# Altium PCB MainBoard.PcbDoc (part 3 of 5)
Units mm, origin at the board's own origin, x right, y up, seen from the top; angles counter-clockwise.
Board outline 82.5 x 82.5 mm, 2 copper layers (Top Layer, Bottom Layer); 145 components, 141 nets, 702 pads, 289 vias.
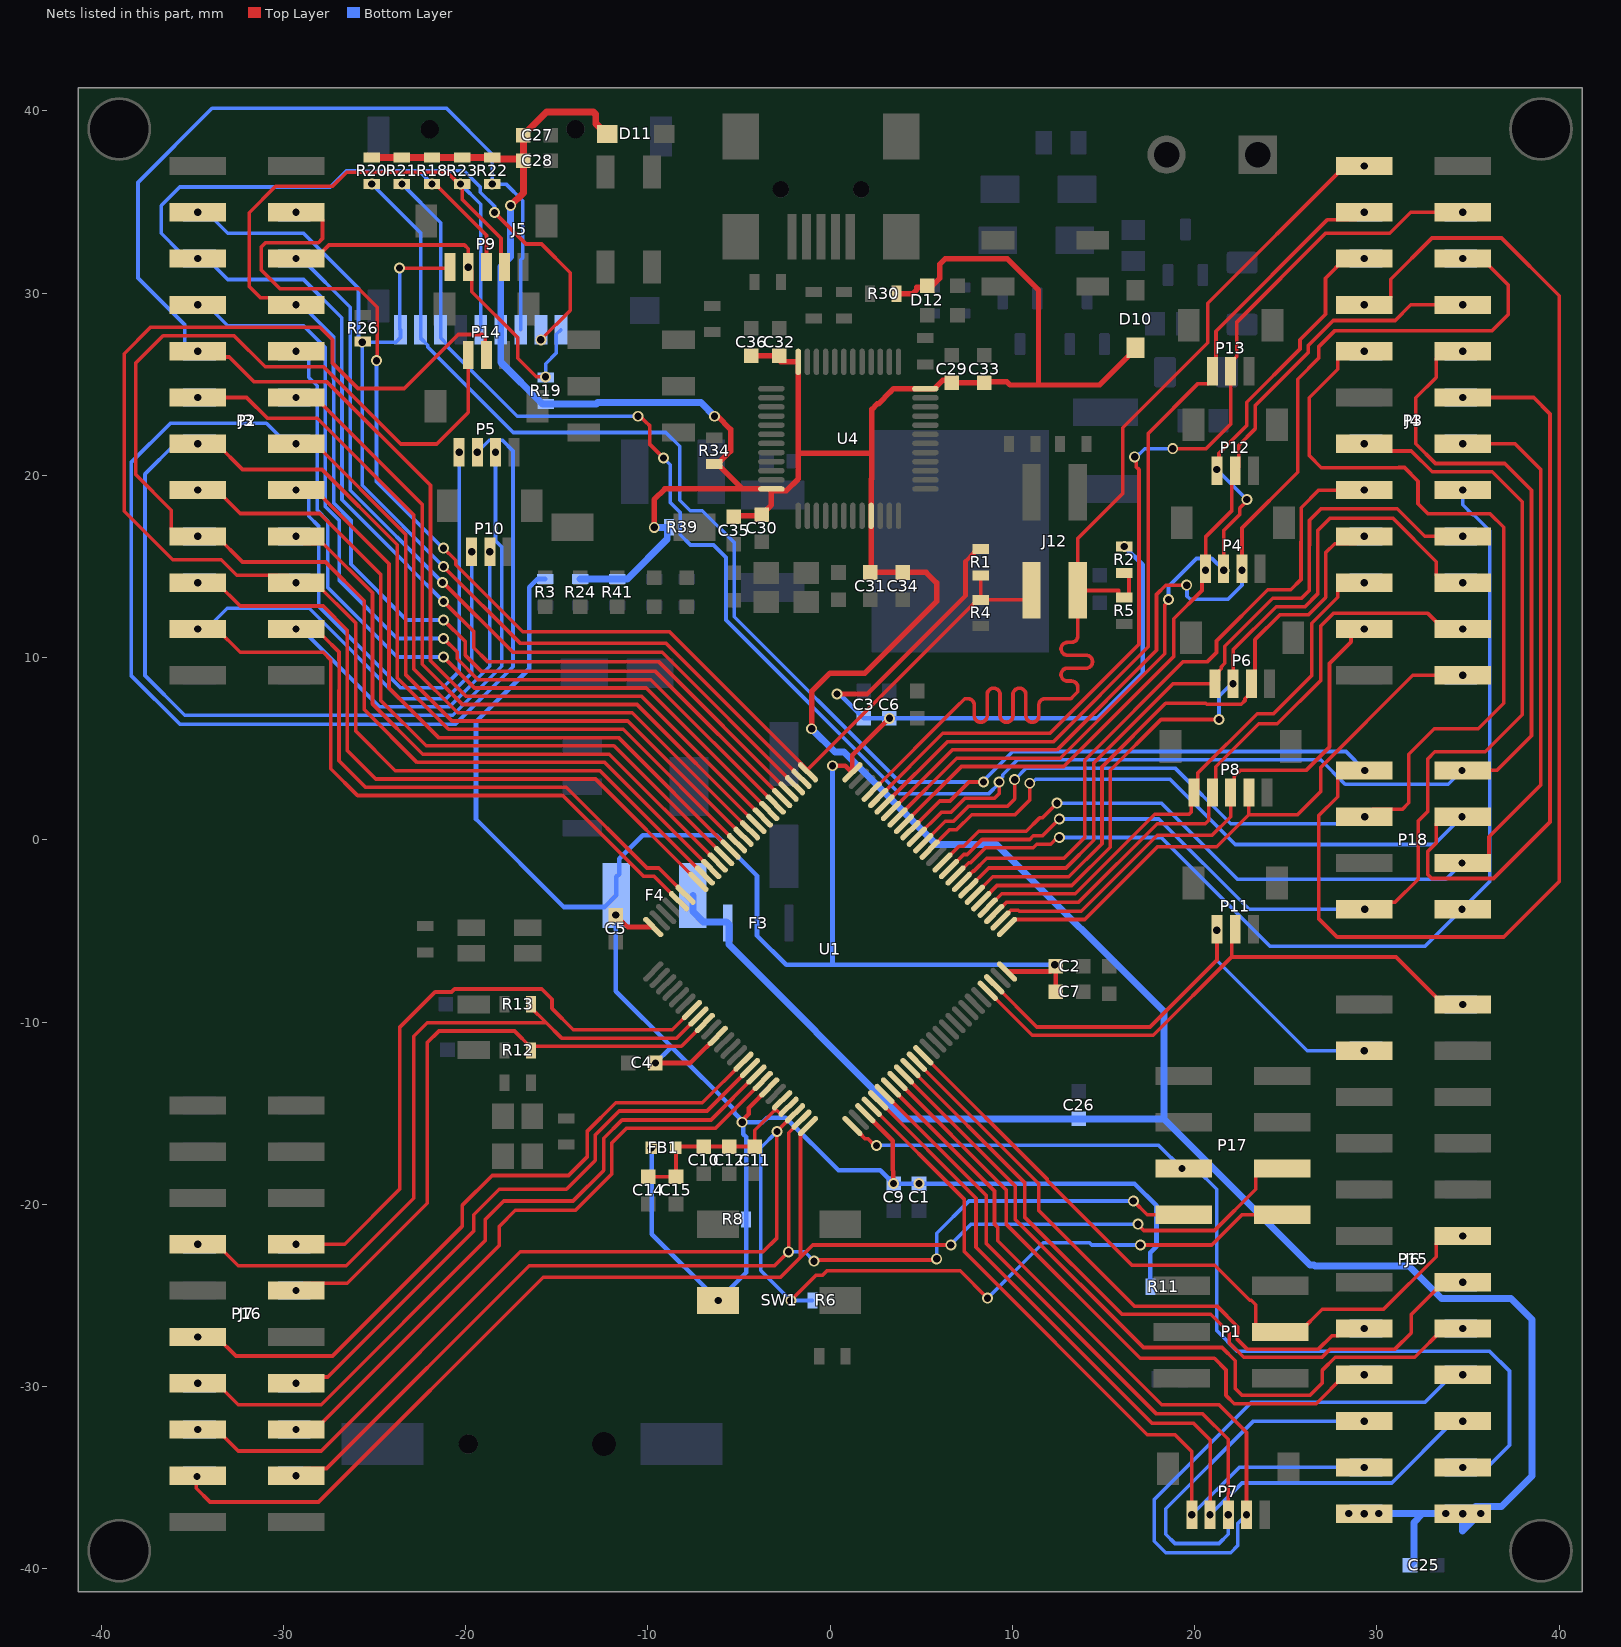
[diagram p2: the nets of this part, all layers, seen from the top]

## Part data (continued)
J8: library part CMP-111-000033-1, "Mini USB 2.0 Type B Receptacle WR-COM, Horizontal, SMT, with Pads and Pegs", Contact Resistance="20 mOhm", Operating Temperature="-40 to 105 degC", Rated Current="1 A", Working Voltage="30 VAC", Component Type=Standard, ComponentLink1Description=Datasheet, ComponentLink1URL=https://katalog.we-online.de/em/datasheet/65100516121.pdf, ComponentLink2Description="Supplier 1 URL", ComponentLink2URL=N/A, ComponentLink3Description="Supplier 2 URL", ComponentLink3URL=N/A, ComponentLink4Description="Supplier 3 URL", ComponentLink4URL=N/A, Connector Type="Mini USB 2.0 Type B", Design Item ID=65100516121, Gender=Receptacle, Mounting Technology=SMT, Orientation=Horizontal, Packaging="Tape and Reel", Part Number=65100516121, Pin Count=6, Published Date="September 2018", Publisher="Wurth Elektronik", Source="USB Connectors WR-COM.SchLib", Supplier 1 Name=Mouser, Supplier 1 SN=710-65100516121, Supplier 1 URL=https://www.mouser.vn/ProductDetail/Wurth-Elektronik/65100516121?qs=rS3zZhy2AQPLyCguT204Og%3D%3D, Supplier 2 Name=Digi-Key, Supplier 2 SN=N/A, Supplier 2 URL=N/A, Supplier 3 Name=thegioiic, Supplier 3 SN=N/A, Supplier 3 URL=N/A
J9 J10: library part CMP-002-00342-1, "WR-PHD Socket Header, SMT, pitch 2.54mm, Dual Row, Vertical, 4p", Contact Resistance=20mOhm, Manufacturer="Wurth Elektronik", Manufacturer Part Number=61000421821, Operating Temperature="-40 to +105degC", Rated Current=3A, Withstanding Voltage=600VAC, Working Voltage=250VAC, Component Type=Standard, ComponentLink1Description=Manufacturer, ComponentLink1URL=http://www.we-online.de, ComponentLink2Description=Datasheet, ComponentLink2URL=https://www.we-online.com/catalog/datasheet/61000421821.pdf, ComponentLink3Description="Global Supply", ComponentLink3URL=https://www.we-online.com/en/components/products/PHD_2_54_SMT_DUAL_SOCKET_HEADER_6100XX21821?sq=61000421821#61000421821, ComponentLink4Description="Global Supply", ComponentLink4URL=https://www.mouser.vn/ProductDetail/Wurth-Elektronik/61000421821?qs=ulEaXIWI0c%2F%252BuIEt%2FF6jcQ%3D%3D, ComponentLink5Description="Local Supply", ComponentLink5URL=https://www.thegioiic.com/hang-rao-cai-doi-2-54mm-4-chan-2-hang-smd, Design Item ID=61000421821, Gender="Socket Header", Mounting Technology=SMT, Orientation=Vertical, Packaging=Tube, Pin Number=4, Pins=4, Pitch=2.54mm, Published Date="May 2020", Row Number=Dual, Source="WR-PHD_Socket Header_2.54mm.SchLib", Supplier 1 Name=Mouser, Supplier 1 SN=710-61000421821, Supplier 1 URL=https://www.mouser.vn/ProductDetail/Wurth-Elektronik/61000421821?qs=ulEaXIWI0c%2F%252BuIEt%2FF6jcQ%3D%3D, Supplier 2 Name=Digi-Key, Supplier 2 SN=N/A, Supplier 2 URL=N/A, Supplier 3 Name=thegioiic, Supplier 3 SN=N/A, Supplier 3 URL=https://www.thegioiic.com/hang-rao-cai-doi-2-54mm-4-chan-2-hang-smd
J11: library part CMP-002-00440-1, "WR-PHD Socket Header, SMT, pitch 2.54mm, Dual Row, Vertical, 6p", Contact Resistance=20mOhm, Manufacturer="Wurth Elektronik", Manufacturer Part Number=61030621821, Operating Temperature="-40 to +105degC", Rated Current=3A, Withstanding Voltage=600VAC, Working Voltage=250VAC, Component Type=Standard, ComponentLink1Description=Manufacturer, ComponentLink1URL=http://www.we-online.de, ComponentLink2Description=Datasheet, ComponentLink2URL=https://www.we-online.com/catalog/datasheet/61030621821.pdf, ComponentLink3Description="Global Supply", ComponentLink3URL=https://www.we-online.com/en/components/products/PHD_2_54_SMT_DUAL_SOCKET_HEADER_6100XX21821?sq=61030621821#61030621821, ComponentLink4Description="Global Supply", ComponentLink4URL=https://www.mouser.vn/ProductDetail/Wurth-Elektronik/61030621821?qs=Cb2nCFKsA8prWiqa1E1TsA%3D%3D, Design Item ID=61030621821, Gender="Socket Header", Mounting Technology=SMT, Orientation=Vertical, Packaging="Tape and Reel", Pin Number=6, Pins=6, Pitch=2.54mm, Published Date="May 2020", Row Number=Dual, Source="WR-PHD_Socket Header_2.54mm.SchLib", Supplier 1 Name=Mouser, Supplier 1 SN=710-61030621821, Supplier 1 URL=https://www.mouser.vn/ProductDetail/Wurth-Elektronik/61030621821?qs=Cb2nCFKsA8prWiqa1E1TsA%3D%3D, Supplier 2 Name=Digi-Key, Supplier 2 SN=N/A, Supplier 2 URL=N/A, Supplier 3 Name=thegioiic, Supplier 3 SN=N/A, Supplier 3 URL=N/A
J12: library part CMP-002-00436-1, "WR-PHD Pin Header, SMT, pitch 2.54mm, Dual Row, Vertical, 4p", Contact Resistance=20mOhm, Manufacturer="Wurth Elektronik", Operating Temperature="-40 to +125degC", Rated Current=3A, Withstanding Voltage=500VAC, Working Voltage=250VAC, Component Type=Standard, ComponentLink1Description=Manufacturer, ComponentLink1URL=http://www.we-online.de, ComponentLink2Description=Datasheet, ComponentLink2URL=https://www.we-online.com/catalog/datasheet/61030421121.pdf, ComponentLink3Description="Global Supply", ComponentLink3URL=https://www.we-online.com/en/components/products/PHD_2_54_SMT_DUAL_PIN_HEADER_6100XX21121?sq=61030421121#61030421121, ComponentLink4Description="Global Supply", ComponentLink4URL=https://www.mouser.vn/ProductDetail/Wurth-Elektronik/61030421121?qs=PhR8RmCirEbubONBDfvqcw%3D%3D, Design Item ID=61030421121, Gender="Pin Header", Manufacturer Part Number=61030421121, Mounting Technology=SMT, Orientation=Vertical, Packaging="Tape and Reel", Pin Number=4, Pins=4, Pitch=2.54mm, Published Date="May 2020", Row Number=Dual, Source="WR-PHD_Pin Header_2.54mm.SchLib", Supplier 1 Name=Mouser, Supplier 1 SN=710-61030421121, Supplier 1 URL=https://www.mouser.vn/ProductDetail/Wurth-Elektronik/61030421121?qs=PhR8RmCirEbubONBDfvqcw%3D%3D, Supplier 2 Name=Digi-Key, Supplier 2 SN=N/A, Supplier 2 URL=N/A, Supplier 3 Name=thegioiic, Supplier 3 SN=N/A, Supplier 3 URL=N/A, Supply name 1=Mouser
P1: library part CMP-002-00439-1, "WR-PHD Pin Header, SMT, pitch 2.54mm, Dual Row, Vertical, 6p", Contact Resistance=20mOhm, Manufacturer="Wurth Elektronik", Manufacturer Part Number=61030621121, Operating Temperature="-40 to +125degC", Rated Current=3A, Withstanding Voltage=500VAC, Working Voltage=250VAC, Component Type=Standard, ComponentLink1Description=Manufacturer, ComponentLink1URL=http://www.we-online.de, ComponentLink2Description=Datasheet, ComponentLink2URL=https://www.we-online.com/catalog/datasheet/61030621121.pdf, ComponentLink3Description="Global Supply", ComponentLink3URL=https://www.we-online.com/en/components/products/PHD_2_54_SMT_DUAL_PIN_HEADER_6100XX21121?sq=61030621121#61030621121, ComponentLink4Description="Global Supply", ComponentLink4URL=https://www.mouser.vn/ProductDetail/Wurth-Elektronik/61030621121?qs=PhR8RmCirEbl%2F20%2FFLRJRA%3D%3D, Design Item ID=61030621121, Gender="Pin Header", Mounting Technology=SMT, Orientation=Vertical, Packaging="Tape and Reel", Pin Number=6, Pins=6, Pitch=2.54mm, Published Date="May 2020", Row Number=Dual, Source="WR-PHD_Pin Header_2.54mm.SchLib", Supplier 1 Name=Mouser, Supplier 1 SN=710-61000621121, Supplier 1 URL=https://www.mouser.vn/ProductDetail/Wurth-Elektronik/61000621121?qs=PhR8RmCirEYoFU9UUO%252Bbug%3D%3D, Supplier 2 Name=Digi-Key, Supplier 2 SN=N/A, Supplier 2 URL=N/A, Supplier 3 Name=thegioiic, Supplier 3 SN=N/A, Supplier 3 URL=N/A, Supply name 1=Mouser
P2 P3 P15: library part CMP-002-00395-1, "WR-PHD Pin Header, SMT, pitch 2.54mm, Dual Row, Vertical, 24p", Contact Resistance=20mOhm, Manufacturer="Wurth Elektronik", Operating Temperature="-40 to +125degC", Rated Current=3A, Withstanding Voltage=500VAC, Working Voltage=250VAC, Component Type=Standard, ComponentLink1Description=Manufacturer, ComponentLink1URL=http://www.we-online.de, ComponentLink2Description=Datasheet, ComponentLink2URL=https://www.we-online.com/catalog/datasheet/61002421121.pdf, ComponentLink3Description="Global Supply", ComponentLink3URL=https://www.we-online.com/en/components/products/PHD_2_54_SMT_DUAL_PIN_HEADER_6100XX21121?sq=61002421121#61002421121, ComponentLink4Description="Global Supply", ComponentLink4URL=https://www.mouser.vn/ProductDetail/Wurth-Elektronik/61002421121?qs=PhR8RmCirEaUrVIpVd3oMg%3D%3D, Design Item ID=61002421121, Gender="Pin Header", Manufacturer Part Number=61002421121, Mounting Technology=SMT, Orientation=Vertical, Packaging=Tube, Pin Number=24, Pins=24, Pitch=2.54mm, Published Date="May 2020", Row Number=Dual, Source="WR-PHD_Pin Header_2.54mm.SchLib", Supplier 1 Name=Mouser, Supplier 1 SN=710-61002421121, Supplier 1 URL=https://www.mouser.vn/ProductDetail/Wurth-Elektronik/61002421121?qs=PhR8RmCirEaUrVIpVd3oMg%3D%3D, Supplier 2 Name=Digi-Key, Supplier 2 SN=N/A, Supplier 2 URL=N/A, Supplier 3 Name=thegioiic, Supplier 3 SN=N/A, Supplier 3 URL=N/A, Supply name 1=Mouser
P4 P5 P6: library part CMP-002-01224-1, "WR-WTB SMT Male Vertical Shrouded Header, pitch 1mm, 4p", Contact Resistance=20mOhm, Operating Temperature="-25 to +85degC", Rated Current=1A, Withstanding Voltage=500VAC, Working Voltage=50VAC, Component Type=Standard, ComponentLink1Description=Manufacturer, ComponentLink1URL=http://www.we-online.de, ComponentLink2Description=Datasheet, ComponentLink2URL=https://www.we-online.com/catalog/datasheet/665304124022.pdf, ComponentLink3Description="Global Supply", ComponentLink3URL=https://www.we-online.com/en/components/products/WTB_1_00_SMT_MALE_VERTICAL_SHROUDED_HEADER_6653XX124022?sq=665304124022#665304124022, ComponentLink4Description="Global Supply", ComponentLink4URL=https://www.mouser.vn/ProductDetail/Wurth-Elektronik/665304124022?qs=a9WhcLg8qCx8aEna1KcTfg%3D%3D, Design Item ID=665304124022, Gender=Male, Mounting Technology=SMT, Packaging="Tape and Reel", Part Number=665304124022, Pin Number=4, Pins=4, Pitch=1mm, Published Date="January 2020", Publisher="Wurth Elektronik", Source=WR-WTB_1.00mm.SchLib, Supplier 1 Name=Mouser, Supplier 1 SN=710-665304124022, Supplier 1 URL=https://www.mouser.vn/ProductDetail/Wurth-Elektronik/665304124022?qs=a9WhcLg8qCx8aEna1KcTfg%3D%3D, Supplier 2 Name=Digi-Key, Supplier 2 SN=N/A, Supplier 2 URL=N/A, Supplier 3 Name=thegioiic, Supplier 3 SN=N/A, Supplier 3 URL=N/A, Type=Vertical
P7 P8 P9: library part CMP-002-01225-1, "WR-WTB SMT Male Vertical Shrouded Header, pitch 1mm, 5p", Contact Resistance=20mOhm, Operating Temperature="-25 to +85degC", Rated Current=1A, Withstanding Voltage=500VAC, Working Voltage=50VAC, Component Type=Standard, ComponentLink1Description=Manufacturer, ComponentLink1URL=http://www.we-online.de, ComponentLink2Description=Datasheet, ComponentLink2URL=https://www.we-online.com/catalog/datasheet/665305124022.pdf, ComponentLink3Description="Global Supply", ComponentLink3URL=https://www.we-online.com/en/components/products/WTB_1_00_SMT_MALE_VERTICAL_SHROUDED_HEADER_6653XX124022?sq=665305124022#665305124022, ComponentLink4Description="Global Supply", ComponentLink4URL=https://www.mouser.vn/ProductDetail/Wurth-Elektronik/665305124022?qs=a9WhcLg8qCwo9s3v61a5IA%3D%3D, Design Item ID=665305124022, Gender=Male, Mounting Technology=SMT, Packaging="Tape and Reel", Part Number=665305124022, Pin Number=5, Pins=5, Pitch=1mm, Published Date="January 2020", Publisher="Wurth Elektronik", Source=WR-WTB_1.00mm.SchLib, Supplier 1 Name=Mouser, Supplier 1 SN=710-665305124022, Supplier 1 URL=https://www.mouser.vn/ProductDetail/Wurth-Elektronik/665305124022?qs=a9WhcLg8qCwo9s3v61a5IA%3D%3D, Supplier 2 Name=Digi-Key, Supplier 2 SN=N/A, Supplier 2 URL=N/A, Supplier 3 Name=thegioiic, Supplier 3 SN=N/A, Supplier 3 URL=N/A, Type=Vertical
P10 P11 P12 P13 P14: library part CMP-002-01223-1, "WR-WTB SMT Male Vertical Shrouded Header, pitch 1mm, 3p", Contact Resistance=20mOhm, Operating Temperature="-25 to +85degC", Rated Current=1A, Withstanding Voltage=500VAC, Working Voltage=50VAC, Component Type=Standard, ComponentLink1Description=Manufacturer, ComponentLink1URL=http://www.we-online.de, ComponentLink2Description=Datasheet, ComponentLink2URL=https://www.we-online.com/catalog/datasheet/665303124022.pdf, ComponentLink3Description="Global Supply", ComponentLink3URL=https://www.we-online.com/en/components/products/WTB_1_00_SMT_MALE_VERTICAL_SHROUDED_HEADER_6653XX124022?sq=665303124022#665303124022, ComponentLink4Description="Global Supply", ComponentLink4URL=https://www.mouser.vn/ProductDetail/Wurth-Elektronik/665303124022?qs=a9WhcLg8qCyV5ri9HU4hCQ%3D%3D, Design Item ID=665303124022, Gender=Male, Mounting Technology=SMT, Packaging="Tape and Reel", Part Number=665303124022, Pin Number=3, Pins=3, Pitch=1mm, Published Date="January 2020", Publisher="Wurth Elektronik", Source=WR-WTB_1.00mm.SchLib, Supplier 1 Name=Mouser, Supplier 1 SN=710-665303124022, Supplier 1 URL=https://www.mouser.vn/ProductDetail/Wurth-Elektronik/665303124022?qs=a9WhcLg8qCyV5ri9HU4hCQ%3D%3D, Supplier 2 Name=Digi-Key, Supplier 2 SN=N/A, Supplier 2 URL=N/A, Supplier 3 Name=thegioiic, Supplier 3 SN=N/A, Supplier 3 URL=N/A, Type=Vertical
P16: library part CMP-002-00458-1, "WR-PHD Pin Header, SMT, pitch 2.54mm, Dual Row, Vertical, 20p", Contact Resistance=20mOhm, Manufacturer="Wurth Elektronik", Operating Temperature="-40 to +125degC", Rated Current=3A, Withstanding Voltage=500VAC, Working Voltage=250VAC, Component Type=Standard, ComponentLink1Description=Manufacturer, ComponentLink1URL=http://www.we-online.de, ComponentLink2Description=Datasheet, ComponentLink2URL=https://www.we-online.com/catalog/datasheet/61032021121.pdf, ComponentLink3Description="Global Supply", ComponentLink3URL=https://www.we-online.com/en/components/products/PHD_2_54_SMT_DUAL_PIN_HEADER_6100XX21121?sq=61032021121#61032021121, ComponentLink4Description="Global Supply", ComponentLink4URL=https://www.mouser.vn/ProductDetail/Wurth-Elektronik/61032021121?qs=PhR8RmCirEazLxlZVVgCjg%3D%3D, Design Item ID=61032021121, Gender="Pin Header", Manufacturer Part Number=61032021121, Mounting Technology=SMT, Orientation=Vertical, Packaging="Tape and Reel", Pin Number=20, Pins=20, Pitch=2.54mm, Published Date="May 2020", Row Number=Dual, Source="WR-PHD_Pin Header_2.54mm.SchLib", Supplier 1 Name=Mouser, Supplier 1 SN=710-61032021121, Supplier 1 URL=https://www.mouser.vn/ProductDetail/Wurth-Elektronik/61032021121?qs=PhR8RmCirEazLxlZVVgCjg%3D%3D, Supplier 2 Name=Digi-Key, Supplier 2 SN=N/A, Supplier 2 URL=N/A, Supplier 3 Name=thegioiic, Supplier 3 SN=N/A, Supplier 3 URL=N/A, Supply name 1=Mouser
P17 P18: library part CMP-002-00442-1, "WR-PHD Pin Header, SMT, pitch 2.54mm, Dual Row, Vertical, 8p", Contact Resistance=20mOhm, Manufacturer="Wurth Elektronik", Operating Temperature="-40 to +125degC", Rated Current=3A, Withstanding Voltage=500VAC, Working Voltage=250VAC, Component Type=Standard, ComponentLink1Description=Manufacturer, ComponentLink1URL=http://www.we-online.de, ComponentLink2Description=Datasheet, ComponentLink2URL=https://www.we-online.com/catalog/datasheet/61030821121.pdf, ComponentLink3Description="Global Supply", ComponentLink3URL=https://www.we-online.com/en/components/products/PHD_2_54_SMT_DUAL_PIN_HEADER_6100XX21121?sq=61030821121#61030821121, ComponentLink4Description="Global Supply", ComponentLink4URL=https://www.mouser.vn/ProductDetail/Wurth-Elektronik/61030821121?qs=PhR8RmCirEbjbnJ8oQ44mA%3D%3D, Design Item ID=61030821121, Gender="Pin Header", Manufacturer Part Number=61030821121, Mounting Technology=SMT, Orientation=Vertical, Packaging="Tape and Reel", Pin Number=8, Pins=8, Pitch=2.54mm, Published Date="May 2020", Row Number=Dual, Source="WR-PHD_Pin Header_2.54mm.SchLib", Supplier 1 Name=Mouser, Supplier 1 SN=710-61030821121, Supplier 1 URL=https://www.mouser.vn/ProductDetail/Wurth-Elektronik/61030821121?qs=PhR8RmCirEbjbnJ8oQ44mA%3D%3D, Supplier 2 Name=Digi-Key, Supplier 2 SN=N/A, Supplier 2 URL=N/A, Supplier 3 Name=thegioiic, Supplier 3 SN=N/A, Supplier 3 URL=N/A, Supply name 1=Mouser
Q1 Q2 Q3: library part CMP-123-000000-1, "P-Channel 30 V 4.3A (Ta) 1.4W (Ta) Surface Mount SOT-23-3", Package="SOT-23 Alpha &amp; Omega Semiconductor", Check_prices=https://www.snapeda.com/parts/AO3407A/Alpha/view-part/?ref=eda, Component Type=Standard, Design Item ID=AO3407A, MF="Alpha &", MP=AO3407A, Pin Count=3, SnapEDA_Link=https://www.snapeda.com/parts/AO3407A/Alpha/view-part/?ref=snap, Source=AO3407A.SchLib
R1 R2 R4 R5 R7 R8 R11 R14 R18 R19 R20 R21 R22 R23 R26 R34 R35 R39: library part CMP-009-00188-1, "RES, size 0603, 10 KOhm, 1/4 W", Manufacture  Name=OEM, Rated Power="1/4 W", Resistance Tolerance=+/-1%, Component Type=Standard, ComponentLink1Description="Datasheet link", ComponentLink1URL=https://fscdn.rohm.com/en/products/databook/datasheet/passive/resistor/chip_resistor/esr-e.pdf, ComponentLink2Description="Supplier 1 URL", ComponentLink2URL=N/A, ComponentLink3Description="Supplier 2 URL", ComponentLink3URL=https://www.digikey.com/en/products/detail/rohm-semiconductor/ESR03EZPF1002/1983429, ComponentLink4Description="Supplier 3 URL", ComponentLink4URL=N/A, Design Item ID=0006031031, Manufacture  SN=OEM, Mounting Technology=SMT, Pins=2, Size=0603, Source=Resistor_0603.SchLib, Supplier 1 Name=Mouser, Supplier 1 SN=755-ESR03EZPF1002, Supplier 1 URL=https://www.mouser.vn/ProductDetail/ROHM-Semiconductor/ESR03EZPF1002?qs=sGAEpiMZZMvdGkrng054t67Efho1F8r6CDeAsqwFse8%3D, Supplier 2 Name=Digi-Key, Supplier 2 SN="RHM10KADTR-ND RHM10KADCT-ND RHM10KADDKR-ND", Supplier 2 URL=https://www.digikey.com/en/products/detail/rohm-semiconductor/ESR03EZPF1002/1983429, Supplier 3 Name=thegioiic, Supplier 3 SN=N/A, Supplier 3 URL=N/A
R3 R24 R25 R27 R28: library part CMP-009-00209-1, "RES, size 0603, 1.2 KOhm, 1/4 W", Manufacture  Name=OEM, Rated Power="1/4 W", Resistance Tolerance=+/-1%, Component Type=Standard, ComponentLink1Description="Datasheet link", ComponentLink1URL=https://api.pim.na.industrial.panasonic.com/file_stream/main/fileversion/4484, ComponentLink2Description="Supplier 1 URL", ComponentLink2URL=N/A, ComponentLink3Description="Supplier 2 URL", ComponentLink3URL=N/A, ComponentLink4Description="Supplier 3 URL", ComponentLink4URL=N/A, Design Item ID=0006031221, Manufacture  SN=OEM, Mounting Technology=SMT, Pins=2, Size=0603, Source=Resistor_0603.SchLib, Supplier 1 Name=Mouser, Supplier 1 SN=667-ERJ-UP3F1201V, Supplier 1 URL=https://www.mouser.vn/ProductDetail/Panasonic/ERJ-UP3F1201V?qs=sGAEpiMZZMvdGkrng054twq3eZrCFN895BO3G72d%2F02jECAea43bgQ%3D%3D, Supplier 2 Name=Digi-Key, Supplier 2 SN="10-ERJ-UP3F1201VTR-ND 10-ERJ-UP3F1201VCT-ND 10-ERJ-UP3F1201VDKR-ND", Supplier 2 URL=N/A, Supplier 3 Name=thegioiic, Supplier 3 SN=N/A, Supplier 3 URL=N/A
R6 R9 R10 R12 R13 R31 R32: library part CMP-009-00180-1, "RES, size 0603, 0 Ohm, 1/4 W", Manufacture  Name=YAGEO, Manufacture  SN=AC0603FR-070RL, Rated Power="1/4 W", Resistance Tolerance=+/-1%, Component Type=Standard, ComponentLink1Description="Datasheet link", ComponentLink1URL=https://www.mouser.com/datasheet/2/447/Yageo_06282023_ACseries-3224032.pdf, ComponentLink2Description="Supplier 1 URL", ComponentLink2URL=N/A, ComponentLink3Description="Supplier 2 URL", ComponentLink3URL=https://www.digikey.com/en/products/detail/yageo/ac0603fr-070rl/2827812, ComponentLink4Description="Supplier 3 URL", ComponentLink4URL=N/A, Design Item ID=0006030001, Mounting Technology=SMT, Pins=2, Size=0603, Source=Resistor_0603.SchLib, Supplier 1 Name=Mouser, Supplier 1 SN=603-AC0603FR-070RL, Supplier 1 URL=https://www.mouser.com/ProductDetail/YAGEO/AC0603FR-070RL?qs=sGAEpiMZZMtlubZbdhIBIOG3KwTtqrl%2FD2D%252BGuMCfoY%3D, Supplier 2 Name=Digi-Key, Supplier 2 SN=311-0.0LDTR-ND, Supplier 2 URL=https://www.digikey.com/en/products/detail/yageo/ac0603fr-070rl/2827812, Supplier 3 Name=thegioiic, Supplier 3 SN=N/A, Supplier 3 URL=https://www.thegioiic.com/dien-tro-0-ohm-0603-1-
R15 R16 R17: library part CMP-009-00482-1, "RES, size 0805, 10 KOhm, 1/8 W", Manufacture  Name="Vishay Dale", Manufacture  SN=CRCW080515K0FKEAC, Rated Power="1/8 W", Resistance Tolerance=+/-1%, Component Type=Standard, ComponentLink1Description="Datasheet link", ComponentLink1URL=https://www.vishay.com/docs/28773/crcwce3.pdf, ComponentLink2Description="Supplier 1 URL", ComponentLink2URL=https://www.mouser.vn/ProductDetail/Vishay-Dale/CRCW080515K0FKEA?qs=bMjB6bAaLEM4rXT2DoR3BA%3D%3D, ComponentLink3Description="Supplier 2 URL", ComponentLink3URL=https://www.digikey.com/en/products/detail/vishay-dale/CRCW080515K0FKEAC/7928558, ComponentLink4Description="Supplier 3 URL", ComponentLink4URL=N/A, Design Item ID=0008051531, Mounting Technology=SMT, Pins=2, Size=0805, Source=Resistor_0805.SchLib, Supplier 1 Name=Mouser, Supplier 1 SN=71-CRCW0805-15K-E3, Supplier 1 URL=https://www.mouser.vn/ProductDetail/Vishay-Dale/CRCW080515K0FKEA?qs=bMjB6bAaLEM4rXT2DoR3BA%3D%3D, Supplier 2 Name=Digi-Key, Supplier 2 SN=541-4136-2-ND, Supplier 2 URL=https://www.digikey.com/en/products/detail/vishay-dale/CRCW080515K0FKEAC/7928558, Supplier 3 Name=Thegioiic, Supplier 3 SN=N/A, Supplier 3 URL=N/A
R29: library part CMP-009-00189-1, "RES, size 0603, 100 KOhm, 1/4 W", Manufacture  Name=OEM, Rated Power="1/4 W", Resistance Tolerance=+/-1%, Component Type=Standard, ComponentLink1Description="Datasheet link", ComponentLink1URL=https://www.yageo.com/upload/media/product/productsearch/datasheet/rchip/PYu-SR_20105_RoHS_L_10.pdf, ComponentLink2Description="Supplier 1 URL", ComponentLink2URL=N/A, ComponentLink3Description="Supplier 2 URL", ComponentLink3URL=https://www.digikey.com/en/products/detail/yageo/SR0603FR-7T100KL/9373095, ComponentLink4Description="Supplier 3 URL", ComponentLink4URL=N/A, Design Item ID=0006031041, Manufacture  SN=OEM, Mounting Technology=SMT, Pins=2, Size=0603, Source=Resistor_0603.SchLib, Supplier 1 Name=Mouser, Supplier 1 SN=603-SR0603FR-7T100KL, Supplier 1 URL=https://www.mouser.vn/ProductDetail/YAGEO/SR0603FR-7T100KL?qs=sGAEpiMZZMvdGkrng054tz1y1XEHv7sNa%252BA%2F4WiDMf7aGw4zRBb%2FFQ%3D%3D, Supplier 2 Name=Digi-Key, Supplier 2 SN="YAG5821TR-ND YAG5821CT-ND YAG5821DKR-ND", Supplier 2 URL=https://www.digikey.com/en/products/detail/yageo/SR0603FR-7T100KL/9373095, Supplier 3 Name=thegioiic, Supplier 3 SN=N/A, Supplier 3 URL=N/A
R30: library part CMP-009-00235-1, "RES, size 0603, 1.5  KOhm, 1/4 W", Manufacture  Name=OEM, Rated Power="1/4 W", Resistance Tolerance=+/-1%, Component Type=Standard, ComponentLink1Description="Datasheet link", ComponentLink1URL=N/A, ComponentLink2Description="Supplier 1 URL", ComponentLink2URL=N/A, ComponentLink3Description="Supplier 2 URL", ComponentLink3URL=https://www.digikey.com/en/products/detail/yageo/RC0603FR-071R5L/5918292, ComponentLink4Description="Supplier 3 URL", ComponentLink4URL=N/A, Design Item ID=0006031521, Manufacture  SN=OEM, Mounting Technology=SMT, Pins=2, Size=0603, Source=Resistor_0603.SchLib, Supplier 1 Name=Mouser, Supplier 1 SN=755-SFR03EZPF1501, Supplier 1 URL=https://www.mouser.vn/ProductDetail/ROHM-Semiconductor/SFR03EZPF1501?qs=byeeYqUIh0NryWvnzlukLQ%3D%3D, Supplier 2 Name=Digi-Key, Supplier 2 SN=13-RC0603FR-071R5LTR-ND, Supplier 2 URL=https://www.digikey.com/en/products/detail/yageo/RC0603FR-071R5L/5918292, Supplier 3 Name=thegioiic, Supplier 3 SN=N/A, Supplier 3 URL=N/A
R33: library part CMP-009-00184-1, "RES, size 0603, 100 Ohm, 1/4 W", Manufacture  Name=OEM, Rated Power="1/4 W", Resistance Tolerance=+/-1%, Component Type=Standard, ComponentLink1Description="Datasheet link", ComponentLink1URL=https://www.yageo.com/upload/media/product/productsearch/datasheet/rchip/PYu-SR_20105_RoHS_L_10.pdf, ComponentLink2Description="Supplier 1 URL", ComponentLink2URL=N/A, ComponentLink3Description="Supplier 2 URL", ComponentLink3URL=https://www.digikey.com/en/products/detail/yageo/SR0603FR-7T100RL/9373096https://www.digikey.com/en/products/detail/yageo/SR0603FR-7T100RL/9373096, ComponentLink4Description="Supplier 3 URL", ComponentLink4URL=N/A, Design Item ID=0006031011, Manufacture  SN=OEM, Mounting Technology=SMT, Pins=2, Size=0603, Source=Resistor_0603.SchLib, Supplier 1 Name=Mouser, Supplier 1 SN=603-SR0603FR-7T100RL, Supplier 1 URL=https://www.mouser.vn/ProductDetail/YAGEO/SR0603FR-7T100RL?qs=sGAEpiMZZMvdGkrng054tz1y1XEHv7sNOEBvi%2FAEoxbcgRjDGFawVw%3D%3D, Supplier 2 Name=Digi-Key, Supplier 2 SN="YAG5822TR-ND YAG5822CT-ND YAG5822DKR-ND", Supplier 2 URL=https://www.digikey.com/en/products/detail/yageo/SR0603FR-7T100RL/9373096https://www.digikey.com/en/products/detail/yageo/SR0603FR-7T100RL/9373096, Supplier 3 Name=thegioiic, Supplier 3 SN=N/A, Supplier 3 URL=N/A
R36 R37: library part CMP-009-00265-1, "RES, size 0603, 20 Ohm, 1/4 W", Manufacture  Name=OEM, Rated Power="1/4 W", Resistance Tolerance=+/-1%, Component Type=Standard, ComponentLink1Description="Datasheet link", ComponentLink1URL=N/A, ComponentLink2Description="Supplier 1 URL", ComponentLink2URL=N/A, ComponentLink3Description="Supplier 2 URL", ComponentLink3URL=https://www.digikey.com/en/products/detail/yageo/RC0603FR-1020RL/14008331, ComponentLink4Description="Supplier 3 URL", ComponentLink4URL=N/A, Design Item ID=0006032001, Manufacture  SN=OEM, Mounting Technology=SMT, Pins=2, Size=0603, Source=Resistor_0603.SchLib, Supplier 1 Name=Mouser, Supplier 1 SN=667-ERJ-H3EF20R0V, Supplier 1 URL=https://www.mouser.vn/ProductDetail/Panasonic/ERJ-H3EF20R0V?qs=eP2BKZSCXI5MeliV8G5lXA%3D%3D, Supplier 2 Name=Digi-Key, Supplier 2 SN=13-RC0603FR-1020RLTR-ND, Supplier 2 URL=https://www.digikey.com/en/products/detail/yageo/RC0603FR-1020RL/14008331, Supplier 3 Name=thegioiic, Supplier 3 SN=N/A, Supplier 3 URL=N/A
R38 R40 R41: library part CMP-009-00186-1, "RES, size 0603, 1 KOhm, 1/4 W", Manufacture  Name=OEM, Rated Power="1/4 W", Resistance Tolerance=+/-1%, Component Type=Standard, ComponentLink1Description="Datasheet link", ComponentLink1URL=https://www.yageo.com/upload/media/product/productsearch/datasheet/rchip/PYu-SR_20105_RoHS_L_10.pdf, ComponentLink2Description="Supplier 1 URL", ComponentLink2URL=N/A, ComponentLink3Description="Supplier 2 URL", ComponentLink3URL=https://www.digikey.com/en/products/detail/yageo/SR0603FR-7T1KL/9373103, ComponentLink4Description="Supplier 3 URL", ComponentLink4URL=N/A, Design Item ID=0006031021, Manufacture  SN=OEM, Mounting Technology=SMT, Pins=2, Size=0603, Source=Resistor_0603.SchLib, Supplier 1 Name=Mouser, Supplier 1 SN=71-RCS06031K00FKEA, Supplier 1 URL=https://www.mouser.vn/ProductDetail/Vishay-Dale/RCS06031K00FKEA?qs=sGAEpiMZZMvdGkrng054t9clqp6gtJJdzI9PGMrTQi4RTIuHToNahw%3D%3D, Supplier 2 Name=Digi-Key, Supplier 2 SN="YAG5829TR-ND YAG5829CT-ND YAG5829DKR-ND", Supplier 2 URL=https://www.digikey.com/en/products/detail/yageo/SR0603FR-7T1KL/9373103, Supplier 3 Name=thegioiic, Supplier 3 SN=N/A, Supplier 3 URL=N/A
Scr1 Scr2 Scr3 Scr4: library part CMP-143-000000-1, Component Type=Standard, Design Item ID=MP3.2, Pin Count=1, Source=MP_3P2.SchLib
SW1 SW2 SW3: library part CMP-011-00108-1, "WS-TASV SMT Tact Switch, L6 x W3.5 x H5mm, 260g, SPST-NO, 12V, 50mA", Manufacturer="Wurth Elektronik", Operating Temperature Max=85°C, Operating Temperature Min=-40°C, Rated Current=50mA, Rated Voltage=12VDC, Category="Tact Switches", Circuit=SPST-NO, Component Type=Standard, Contact Material="Stainless Steel", Design Item ID=434111050826, Height=5mm, Length=6mm, Manufacturer Part Number=434111050826, Match Code=WS-TASV, Mount="Surface Mount", Operation Force=260g, Packaging="Tape and Reel", Pins=2, Source=Button.SchLib, Supplier 1 Name=Mouser, Supplier 1 SN=710-434111050826, Supplier 1 URL=https://www.mouser.vn/ProductDetail/Wurth-Elektronik/434111050826?qs=wr8lucFkNMW%252BYjUPWhhK5A%3D%3D, Supplier 2 Name=Digi-Key, Supplier 2 SN=732-7041-2-ND, Supplier 2 URL=https://www.digikey.com/en/products/detail/w%C3%BCrth-elektronik/434111050826/5209074, Supplier 3 Name=Thegioiic, Supplier 3 SN=N/A, Supplier 3 URL=https://www.thegioiic.com/nut-nhan-3-5x6mm-cao-5mm-2-chan-smd-dau-trang, Terminal Material="Copper Alloy", Terminal Plating=Silver, Washable=No, Width=3.5mm
U1: library part STM32F407VGTx-000006-1, "ARM Microcontrollers - MCU ARM M4 1024 FLASH 168 Mhz 192kB SRAM", Manufacture SN=STM32F407VGTx, Manufacturer=STM, Part Number=STM32F407IGTx, Component Type=Standard, ComponentLink1Description=Datasheet, ComponentLink1URL=https://www.mouser.com/datasheet/2/389/stm32f745ie-1851206.pdf, ComponentLink2Description="Supplier 1 URL", ComponentLink2URL=https://www.mouser.com/ProductDetail/STMicroelectronics/STM32F407VGT6?qs=Z8%252BeY1k3TIKAEQqwbO%2FOzA%3D%3D, ComponentLink3Description="Supplier 2 URL", ComponentLink3URL=497-11605-ND, ComponentLink4Description="Supplier 3 URL", ComponentLink4URL=N.A, Design Item ID=STM32F407VGTx, Footprint name=LQFP100, Pad Count=100, Pins=100, Source=STM32.SchLib, Supplier 1 Name=Mouser, Supplier 1 SN=511-STM32F407VGT6, Supplier 1 URL=https://www.mouser.com/ProductDetail/STMicroelectronics/STM32F407VGT6?qs=Z8%252BeY1k3TIKAEQqwbO%2FOzA%3D%3D, Supplier 2 Name=Digi-Key, Supplier 2 SN=497-11605-ND, Supplier 2 URL=https://www.digikey.com/en/products/detail/stmicroelectronics/stm32f407vgt6/2747117, Supplier 3 Name=thegioiic, Supplier 3 SN=N.A, Supplier 3 URL=N.A
U2: library part CMP-098-000007-1, "Out: 5V, 1.5A; In: 7V to 35V; Pacakge: TO-263", Output Current=1.5A, Package=TO-263, Voltage Input Maximum="7V to 35V", Voltage Output=5V, Component Type=Standard, ComponentLink1Description="Datasheet link", ComponentLink1URL=https://www.st.com/resource/en/datasheet/l78.pdf, ComponentLink2Description="Supplier 1 URL", ComponentLink2URL=https://www.mouser.com/ProductDetail/STMicroelectronics/L7805ACD2T-TR?qs=Ctxo64yJVFuOLXlPPZdJUQ%3D%3D, ComponentLink3Description="Supplier 2 URL", ComponentLink3URL=https://www.digikey.com/en/products/detail/stmicroelectronics/L7805ACD2T-TR/1038230, ComponentLink4Description="Supplier 3 URL", ComponentLink4URL=https://www.thegioiic.com/l7805acd2t-ic-on-ap-5v-1-5a, Design Item ID=L7805ACD2T_TO-263, Pin Count=3, Source=78xx.SchLib, Supplier 1 Name=Mouser, Supplier 1 SN=511-L7805ACD2T-TR, Supplier 1 URL=https://www.mouser.com/ProductDetail/STMicroelectronics/L7805ACD2T-TR?qs=Ctxo64yJVFuOLXlPPZdJUQ%3D%3D, Supplier 2 Name=Digi-Key, Supplier 2 SN=497-7253-2-ND, Supplier 2 URL=https://www.digikey.com/en/products/detail/stmicroelectronics/L7805ACD2T-TR/1038230, Supplier 3 Name=thegioiic, Supplier 3 SN=N/A, Supplier 3 URL=https://www.thegioiic.com/l7805acd2t-ic-on-ap-5v-1-5a
U3: library part CMP-098-000004-1, "AMS1117-3.3V, OUT 3.3V 1A.", Current Input Maximum=N/A, Current Output Maximum=1A, Manufacturer=AMS, Voltage Input Maximum=15V, Voltage Output=3.3V, Component Type=Standard, ComponentLink1Description="Datasheet link", ComponentLink1URL=http://www.advanced-monolithic.com/pdf/ds1117.pdf, ComponentLink2Description="Supplier 1 URL", ComponentLink2URL=N/A, ComponentLink3Description="Supplier 2 URL", ComponentLink3URL=N/A, ComponentLink4Description="Supplier 3 URL", ComponentLink4URL=N/A, Design Item ID=AMS1117-3.3V, Manufacturer Part Number=N/A, Mounting Technology=SMD, Pad Count=4, Pin Count=4, Source=AMS_family.SchLib, Supplier 1 Name=Mouser, Supplier 1 SN=N/A, Supplier 1 URL=N/A, Supplier 2 Name=Digi-Key, Supplier 2 SN=N/A, Supplier 2 URL=N/A, Supplier 3 Name=thegioiic, Supplier 3 SN=N/A, Supplier 3 URL=https://www.thegioiic.com/ams1117-3-3v-ic-on-ap-3-3v-1a-sot-223
U4: library part STM32F103C8T6-000006-1, "ARM Microcontrollers - MCU 32BIT Cortex M3 64KB 20KB RAM 2X12 ADC", Manufacture SN=STM32F103C8T6TR, Manufacturer=STM, Component Type=Standard, ComponentLink1Description=Datasheet, ComponentLink1URL=https://www.mouser.com/datasheet/2/389/stm32f103c8-1851025.pdf, ComponentLink2Description="Supplier 1 URL", ComponentLink2URL=https://www.mouser.com/ProductDetail/STMicroelectronics/STM32F103C8T6?qs=bhCVus9SdFtq6kqxsU5%2FDA%3D%3D, ComponentLink3Description="Supplier 2 URL", ComponentLink3URL=497-17666-2-ND, ComponentLink4Description="Supplier 3 URL", ComponentLink4URL=https://www.thegioiic.com/stm32f103c8t6-32-bit-arm-cortex-m3-microcontroller-72mhz-64kb-flash-48-lqfp, Design Item ID=STM32F103C8T6, Footprint name=LQFP48, Pad Count=48, Part Number=STM32F103C8T6, Pins=48, Source=STM32.SchLib, Supplier 1 Name=Mouser, Supplier 1 SN=511-STM32F103C8T6, Supplier 1 URL=https://www.mouser.com/ProductDetail/STMicroelectronics/STM32F103C8T6?qs=bhCVus9SdFtq6kqxsU5%2FDA%3D%3D, Supplier 2 Name=Digi-Key, Supplier 2 SN=497-17666-2-ND, Supplier 2 URL=https://www.digikey.com/en/products/detail/stmicroelectronics/stm32f103c8t6tr/2122442, Supplier 3 Name=thegioiic, Supplier 3 SN=STM32F103C8T6, Supplier 3 URL=https://www.thegioiic.com/stm32f103c8t6-32-bit-arm-cortex-m3-microcontroller-72mhz-64kb-flash-48-lqfp
Y1 Y3: library part CMP-003-00057-1, "CRYSTAL 25.0000MHZ 8PF SMD", Case/Package=NX3225SA, Frequency=25MHz, Load Capacitance=8pF, Manufacturer=NDK, Manufacturer Part Number=NX3225SA-25.000M-STD-CRS-2, Temperature="-40°C to +125°C", Temperature Range High=125°C, Temperature Range Low=-40°C, Tolerance=15ppm, Automotive=Yes, Automotive Grade="Grade 1", Category=Crys, Component Type=Standard, Design Item ID=CMP-200220-000002-1, Device Class L1="Passive Components", Device Class L2="Crystals / Oscillators", Device Class L3=Crystals, Digikey Description="CRYSTAL 25.0000MHZ 8PF SMD", Esr=100, Height=0.6mm, Lead Free=Yes, Octopart=https://octopart.com/nx3225sa-25.000m-std-crs-2-ndk-51374293, Pins=4, RoHS=TRUE, Series=NX3225SA, Source="Components - 28.03.25 - 23.15.SchLib"
Y2: library part CMP-003-00053-1, "Parallel - Fundamental Quartz Crystal, 0.032768MHz Nom", Frequency Stability=0.0144%, Frequency Tolerance=20ppm, Load Capacitance=12.5pF, Max Operating Temperature=85°C, Min Operating Temperature=-40°C

## Via types
v1: diameter 0.6, hole 0.4, Top Layer to Bottom Layer, 223 vias
v2: diameter 0.6, hole 0.4, Top Layer to Bottom Layer, tented both sides, 66 vias

## Nets (pads, with @x,y where several pads share a name; then routed paths per layer and width w, separated by ;. In a path a pad name is that pad's centre, name@x,y a point inside that pad or via, vN(x,y) a via of type N, cw(c..) or ccw(c..) an arc to the next point about the centre after c; other vN are vias at no path point)
3V3_MCU: C1.2 C2.2 C3.2 C4.2 C5.2 C6.2 C7.2 C9.2 F4.1 FB1.1 R1.2 R2.2 R3.2 R8.2 R11.2 SW1.2 U1.11 U1.19 U1.28 U1.50 U1.75 U1.100 | length 193.2
  Top Layer w0.254: v1(-11.76,-4.127) -11.107,-4.78 U1.100@-9.705,-4.78 ; v1(-9.588,-12.243) -7.671,-12.243 -6.767,-11.339 -6.753,-11.339 U1.11@-6.17,-10.755 ; v1(-4.826,-15.494) -4.826,-15.4 -4.467,-15.042 -4.467,-14.71 U1.19@-3.341,-13.584 ; v1(0.127,4.064) 0.128,4.065 0.829,4.065 1.19,3.705 U1.75@1.22,3.705 1.22,4.635 v1(3.251,6.667) ; v1(0.381,8.001) 2.032,8.001 7.424,13.393 7.424,15.271 7.932,15.779 7.932,15.817 8.08,15.965 R1.2@8.255,15.965 ; U1.28@1.927,-14.998 3.429,-16.5 3.429,-18.136 3.471,-18.178 3.471,-18.85 v1(3.48,-18.859) ; U1.50@9.705,-7.22 12.096,-7.22 C2.2@12.382,-6.934 C7.2@12.382,-8.331
  Bottom Layer w0.254: R3.2@-15.621,14.314 -16.049,14.314 -16.51,13.853 -16.51,9.398 -19.431,6.477 -19.431,1.143 -14.605,-3.683 -12.37,-3.683 F4.1@-11.735,-3.048 -11.735,-2.032 -11.579,-1.876 -11.579,-1.038 -10.287,0.254 -6.245,0.254 -4.011,-1.979 -4.011,-5.26 -2.413,-6.858 0.127,-6.858 ; v1(-11.76,-4.127) -11.76,-8.306 -8.705,-11.361 -8.636,-11.43 ; v1@-9.779,-16.891 -9.779,-21.638 v1(-6.144,-25.273) -4.609,-23.738 R8.2@-4.609,-20.828 -4.609,-16.302 -4.76,-16.151 -4.76,-15.56 v1(-4.826,-15.494) ; v1(-9.588,-12.243) -8.775,-11.43 -8.636,-11.43 ; v1(0.127,4.064) 0.127,-6.858 ; v1(0.381,8.001) 0.447,7.935 0.586,7.935 C3.2@1.854,6.667 v1(3.251,6.667) 14.668,6.667 17.145,9.144 17.145,15.09 v1(16.143,16.092) ; v1(12.319,-6.858) 0.127,-6.858 ; R11.2@17.563,-24.511 17.563,-22.643 17.907,-22.299 17.907,-20.066 16.7,-18.859 v1(4.877,-18.859) v1(3.48,-18.859) 2.755,-18.134 0.458,-18.134 -2.436,-15.24 -3.457,-15.24 -3.711,-15.494 v1(-4.826,-15.494) ; -8.636,-11.43 -5.27,-14.796 -5.27,-14.975 -4.826,-15.42 v1(-4.826,-15.494)
  other v1: -9.811,-16.91
3V3_MCU_VCCA: C10.2 C11.2 C12.2 C14.2 C15.2 FB1.2 U1.21 U1.22 | length 11.6
  Top Layer w0.2: C14.2@-9.982,-18.478 C15.2@-8.458,-18.478 -8.458,-16.902 FB1.2@-8.469,-16.891 -8.405,-16.827 C10.2@-6.934,-16.827 C11.2@-4.14,-16.827 -4.14,-16.573 -4.14,-15.938 -3.06,-14.857 ; U1.21@-2.634,-14.291 -2.805,-14.462 -2.805,-14.467 -3.06,-14.722 -3.06,-14.857 ; U1.22@-2.28,-14.644 -2.668,-15.032 -2.733,-15.032 -2.908,-14.857 -3.06,-14.857
3V3_STL: C25.2 C26.2 C27.2 C28.2 C29.2 C30.2 C31.2 C32.2 C33.2 C34.2 C35.2 C36.2 D10.K D11.K D12.2 F3.1 F4.0 J5.4 J6.1 J6.2 P15.1 P15.2 R18.2 R19.2 R20.2 R21.2 R22.2 R23.2 R24.2 R30.2 R34.2 R39.2 R41.1 U4.9 U4.24 U4.36 U4.48 | length 247.6
  Top Layer w0.3: v1(-9.652,17.145) -9.652,18.669 -9.071,19.25 -4.814,19.25 ; R34.2@-6.35,20.611 R34.2@-6.175,20.611 ; v1(-6.35,23.241) -6.176,23.241 -5.455,22.52 -5.455,21.331 R34.2@-6.175,20.611 ; C35.2@-5.283,17.717 -5.22,17.781 -3.823,17.781 C30.2@-3.759,17.844 -3.225,18.378 -3.225,19.155 -2.404,19.155 -1.75,19.809 -1.75,21.209 ; C36.2@-4.327,26.561 C32.2@-2.803,26.561 -2.718,26.476 -2.718,26.225 U4.36@-1.75,26.225 -1.75,21.209 ; U4.48@-3.225,19.25 -4.814,19.25 ; v1(-1.016,6.096) -1.016,8.128 0,9.144 1.905,9.144 5.842,13.081 5.842,14.097 5.27,14.669 C34.2@3.988,14.669 C31.2@2.21,14.669 2.25,14.709 U4.9@2.25,17.775 2.25,19.773 2.286,19.809 2.286,21.209 ; R30.2@3.646,29.972 4.534,29.972 4.757,30.195 4.757,30.322 5.265,30.322 D12.2@5.334,30.391 5.397,30.328 5.524,30.328 6.003,30.806 6.003,31.568 6.306,31.871 9.722,31.871 11.43,30.163 11.43,24.955 ; D10.K@16.764,27.005 16.764,26.94 14.779,24.955 11.43,24.955 ; R34.2@-6.175,20.611 -4.814,19.25 ; -1.75,21.209 2.286,21.209 ; 2.286,21.209 2.286,23.622 2.58,23.916 2.641,23.916 3.318,24.592 3.475,24.75 5.719,24.75 6.172,25.203 6.293,25.203 6.344,25.253 6.509,25.253 C29.2@6.68,25.082 C33.2@8.458,25.082 8.522,25.145 9.684,25.145 9.874,24.955 11.43,24.955
  Top Layer w0.381: R20.2@-25.146,37.428 R21.2@-23.495,37.428 R18.2@-21.844,37.428 R23.2@-20.193,37.428 R22.2@-18.542,37.428 -18.459,37.345 -16.911,37.345 C28.2@-16.828,37.262 ; v1(-17.526,34.798) -16.828,35.496 C28.2@-16.828,37.262 ; D11.K@-12.238,38.735 -12.303,38.735 -12.862,39.294 -12.862,39.802 -12.994,39.934 -15.553,39.934 C27.2@-16.828,38.659 C28.2@-16.828,37.262
  Bottom Layer w0.381: v1(-17.526,34.798) -17.526,31.971 -18.071,31.426 J5.4@-18.071,27.989 -18.071,26.202 -15.782,23.913 R19.2@-15.607,23.913 -12.826,23.913 -12.754,23.985 -7.094,23.985 v1(-6.35,23.241) ; R24.2@-13.716,14.314 R41.1@-11.684,14.314 -11.128,14.314 -8.938,16.504 -8.938,17.06 R39.2@-8.853,17.145 v1(-9.652,17.145) ; F4.0@-7.533,-3.048 -7.533,-3.937 -6.962,-4.508 -5.677,-4.508 F3.1@-5.613,-4.572 -5.55,-4.635 -5.55,-5.753 4.001,-15.304 C26.2@13.64,-15.304 18.315,-15.304 ; v1(-1.016,6.096) 0.272,4.808 0.764,4.808 5.821,-0.248 9.138,-0.248 18.315,-9.425 18.315,-15.304 ; v1(29.3,-36.97) J6.1@29.4,-36.97 32.499,-36.97 ; C25.2@31.813,-39.802 32.022,-39.592 32.022,-37.447 32.499,-36.97 ; J6.2@34.6,-36.97 v1(34.7,-36.97) ; J6.2@35.328,-37.298 34.7,-37.926 v1(34.7,-36.97) ; 18.315,-15.304 26.337,-23.325 26.544,-23.325 26.598,-23.379 31.757,-23.379 33.538,-25.161 37.354,-25.161 38.504,-26.311 38.504,-34.903 36.844,-36.564 35.406,-36.564 35,-36.97 v1(34.7,-36.97) ; 32.499,-36.97 34.325,-36.97 v1(34.7,-36.97)
  other v1: 28.448,-36.957 30.099,-36.957 33.782,-36.957 35.687,-36.957
A0: J7.16 P16.15 P17.1 R6.1 U1.23 | length 86.1
  Top Layer w0.2: v1(-34.7,-32.35) -33.65,-32.35 -32.472,-33.528 -27.927,-33.528 -17.005,-22.606 -3.683,-22.606 -2.921,-21.844 v1(-2.921,-16.002) -2.921,-15.992 U1.23@-1.927,-14.998 ; v1(-2.159,-25.273) -0.778,-23.892 -0.423,-23.892 -0.172,-23.641 7.131,-23.641 v1(8.636,-25.146) ; v2(17.018,-22.225) 20.94,-22.225 22.591,-20.574 P17.1@24.798,-20.574
  Bottom Layer w0.2: v1(-2.921,-16.002) -3.81,-16.891 -3.81,-23.622 v1(-2.159,-25.273) R6.1@-0.979,-25.273 ; v1(8.636,-25.146) 11.684,-22.098 14.233,-22.098 14.36,-22.225 v2(17.018,-22.225)
A1: J7.17 P16.18 P17.2 U1.24 | length 64
  Top Layer w0.2: v1(-29.3,-34.89) -28.9,-34.49 -27.632,-34.49 -16.51,-23.368 -3.048,-23.368 v1(-2.286,-22.606) ; v1@-2.267,-22.587 -2.267,-16.072 -1.573,-15.379 U1.24@-1.573,-15.351 ; v1(-0.889,-23.114) -0.826,-23.05 5.779,-23.05 v1(5.842,-22.987) ; v2(16.637,-19.812) 17.399,-20.574 P17.2@19.398,-20.574
  Bottom Layer w0.2: v1(-2.286,-22.606) -1.397,-22.606 v1(-0.889,-23.114) ; v1(5.842,-22.987) 5.842,-21.59 7.62,-19.812 v2(16.637,-19.812)
A2: J7.18 P16.17 P17.3 U1.25 | length 76.3
  Top Layer w0.2: P16.17@-34.7,-34.89 v1(-34.743,-34.933) -34.785,-34.975 -34.785,-35.573 -34.029,-36.329 -28.074,-36.329 -15.748,-24.003 -2.727,-24.003 -1.626,-22.902 ; U1.25@-1.22,-15.705 -1.626,-16.112 -1.626,-22.902 ; v1(6.623,-22.226) v1(6.623,-22.226) -0.949,-22.225 -1.626,-22.902 ; v2(16.891,-21.082) 16.891,-21.113 17.208,-21.43 21.093,-21.43 23.348,-19.175 23.348,-18.434 23.748,-18.034 P17.3@24.798,-18.034
  Bottom Layer w0.2: v1(6.623,-22.226) 6.623,-22.206 7.747,-21.082 v2(16.891,-21.082)
A3: J6.4 P15.3 P17.4 U1.26 | length 53.3
  Top Layer w0.2: U1.26@1.22,-15.705 1.659,-16.144 1.905,-16.39 2.065,-16.39 2.439,-16.764 v1(2.54,-16.764)
  Bottom Layer w0.2: v1(2.54,-16.764) 18.034,-16.764 v1(19.304,-18.034) 20.066,-18.034 21.209,-19.177 21.209,-26.924 22.352,-28.067 36.195,-28.067 37.27,-29.142 37.27,-33.215 36.055,-34.43 v1(34.7,-34.43)
A4: J6.3 P7.1 P15.4 U1.29 | length 41.1
  Top Layer w0.2: U1.29@2.28,-14.644 7.366,-19.73 7.366,-22.606 17.399,-32.639 18.923,-32.639 19.844,-33.56 v1(19.844,-37.031)
  Bottom Layer w0.2: v1(19.844,-37.031) 22.445,-34.43 v1(29.3,-34.43)
A5: J6.6 P7.2 P15.5 U1.30 | length 47.6
  Top Layer w0.2: U1.30@2.634,-14.291 8.001,-19.658 8.001,-22.352 17.653,-32.004 19.939,-32.004 20.844,-32.909 v1(20.844,-37.031)
  Bottom Layer w0.2: v1(20.844,-37.031) 22.591,-35.284 30.806,-35.284 34.2,-31.89 v1(34.7,-31.89)
A6: J6.5 P7.3 P15.6 U1.31 | length 51.6
  Top Layer w0.2: U1.31@2.988,-13.937 8.563,-19.513 8.563,-22.152 17.907,-31.496 20.447,-31.496 21.844,-32.893 v1(21.844,-37.031)
  Bottom Layer w0.2: v1(21.844,-37.031) 21.844,-38.1 21.336,-38.608 18.923,-38.608 18.415,-38.1 18.415,-36.703 23.228,-31.89 v1(29.3,-31.89)
A7: J6.8 P7.4 P15.7 U1.32 | length 62.3
  Top Layer w0.2: U1.32@3.341,-13.584 9.017,-19.26 9.017,-21.082 9.198,-21.263 9.198,-21.989 18.197,-30.988 21.336,-30.988 22.844,-32.496 v1(22.844,-37.031)
  Bottom Layer w0.2: v1(22.844,-37.031) 22.369,-37.506 22.369,-38.718 21.971,-39.116 18.415,-39.116 17.78,-38.481 17.78,-36.195 23.114,-30.861 32.639,-30.861 33.75,-29.75 34.3,-29.75 v1(34.7,-29.35)
A8: J4.7 P3.8 P4.1 P12.2 U1.67 | length 48
  Top Layer w0.2: U1.67@4.048,0.877 4.054,0.877 7.203,4.026 12.817,4.026 18.852,10.061 18.852,12.134 20.398,13.68 20.398,14.585 v1(20.598,14.785) ; P4.1@20.598,14.874 20.598,16.612 22.025,18.039 22.025,20.046 22.425,20.446 22.425,21.656 23.314,22.545 23.314,23.815 26.235,26.736 26.235,27.124 27.607,28.496 30.997,28.496 31.851,29.35 v1(34.7,29.35)
A9: J4.6 P3.5 P4.2 P12.1 U1.68 | length 48.3
  Top Layer w0.2: U1.68@3.695,1.23 3.7,1.23 6.95,4.48 12.629,4.48 18.361,10.212 18.361,12.883 18.561,13.083 v2(18.561,13.191) ; v1(21.209,20.32) 21.331,20.442 21.331,21.204 22.86,22.733 22.86,24.003 25.781,26.924 25.781,27.432 27.178,28.829 27.178,30.818 28.25,31.89 v1(29.3,31.89) ; P4.2@21.598,14.912 21.598,16.969 22.479,17.85 22.479,18.201 22.86,18.582 v1(22.86,18.669)
  Bottom Layer w0.2: v2(18.561,13.191) 18.561,13.898 20.102,15.439 20.944,15.439 v1(21.598,14.785) ; v1(21.209,20.32) v1(22.86,18.669)
A10: J4.5 P3.6 P4.3 U1.69 | length 57.9
  Top Layer w0.2: U1.69@3.341,1.584 3.347,1.584 6.697,4.934 12.441,4.934 17.907,10.4 17.907,13.462 18.415,13.97 v2(19.558,13.97) ; v1(22.598,14.785) 22.598,17.106 25.654,20.162 25.654,25.273 26.797,26.416 26.797,27.044 27.693,27.94 36.322,27.94 37.211,28.829 37.211,30.429 35.75,31.89 v1(34.7,31.89)
  Bottom Layer w0.2: v2(19.558,13.97) 19.575,13.953 19.575,13.37 19.75,13.195 21.831,13.195 22.598,13.962 v1(22.598,14.785)
A11: J4.4 P3.3 P13.1 U1.70 | length 48.1
  Top Layer w0.2: U1.70@2.988,1.937 6.438,5.388 12.253,5.388 17.453,10.588 17.453,22.3 20.185,25.032 20.771,25.032 20.971,25.232 P13.1@20.971,25.707 21.171,25.907 21.171,27.909 27.292,34.03 28.9,34.03 v1(29.3,34.43)
A12: J4.3 P3.4 P13.2 U1.71 | length 54.8
  Top Layer w0.2: U1.71@2.634,2.291 6.185,5.842 12.065,5.842 16.947,10.724 16.947,20.313 16.786,20.474 16.786,20.936 v2(16.709,21.013) ; v2(18.796,21.463) 20.618,21.463 21.971,22.816 P13.2@21.971,25.707 21.971,26.182 22.317,26.528 22.317,28.413 27.178,33.274 30.695,33.274 31.851,34.43 v1(34.7,34.43)
  Bottom Layer w0.2: v2(16.709,21.013) 16.811,21.013 17.261,21.463 v2(18.796,21.463)
A13: J4.2 J12.2 P3.1 R2.1 R5.2 U1.72 | length 66.3
  Top Layer w0.2: U1.72@2.28,2.644 6.921,7.285 7.383,7.747 7.552,7.747 cw(c7.552,7.393) 7.906,7.393 7.906,6.809 ccw(c8.26,6.809) 8.614,6.809 8.614,7.968 cw(c8.968,7.968) 9.322,7.968 9.322,6.809 ccw(c9.676,6.809) 10.03,6.809 10.03,7.968 cw(c10.384,7.968) 10.738,7.968 10.738,6.809 ccw(c11.092,6.809) 11.446,6.809 11.446,7.393 cw(c11.8,7.393) 11.8,7.747 12.828,7.747 13.208,7.747 13.364,7.903 13.589,8.128 13.589,8.357 ccw(c13.235,8.357) 13.235,8.711 13.022,8.711 cw(c13.022,9.065) 13.022,9.419 14.044,9.419 ccw(c14.044,9.773) 14.044,10.127 13.022,10.127 cw(c13.022,10.481) 13.022,10.835 13.235,10.835 ccw(c13.235,11.189) 13.589,11.189 13.589,13.429 J12.2@13.589,13.683 ; R2.1@16.143,14.642 16.222,14.642 16.397,14.467 16.397,13.473 16.222,13.298 16.012,13.298 15.837,13.473 15.837,13.683 J12.2@13.589,13.683 ; v1(29.3,36.97) 28.25,36.97 20.717,29.437 20.717,27.277 16.055,22.616 16.055,18.999 13.589,16.532 J12.2@13.589,13.683
A14: J3.22 J12.4 P2.21 R1.1 R4.2 U1.76 | length 72.5
  Top Layer w0.2: v1(-29.3,34.43) -28.25,34.43 -27.85,34.03 -27.85,32.991 -28.077,32.764 -30.977,32.764 -31.204,32.537 -31.204,31.243 -30.189,30.228 -25.865,30.228 -24.85,29.214 -24.85,26.331 v2(-24.892,26.289) ; v1(-21.209,16.002) -20.541,15.334 -20.541,15.098 -16.861,11.417 -8.816,11.417 U1.76@-1.245,3.846 ; U1.76@-1.22,3.705 -1.22,3.77 -1.27,3.821 U1.76@-1.245,3.846 ; R1.1@8.255,14.515 R4.2@8.255,13.171 ; J12.4@11.049,13.683 11.049,13.571 10.649,13.171 R4.2@8.255,13.171 ; U1.76@-1.245,3.846 8.08,13.171 R4.2@8.255,13.171
  Bottom Layer w0.2: v2(-24.892,26.289) -24.892,19.652 -21.242,16.002 v1(-21.209,16.002)
A15: J3.21 J5.CD P2.22 P9.1 R26.2 U1.77 | length 61.2
  Top Layer w0.2: v2(-23.622,31.369) -20.91,31.369 P9.1@-20.857,31.422 ; v2(-21.209,14.986) -17.018,10.795 -9.017,10.795 U1.77@-1.573,3.351
  Bottom Layer w0.2: v1(-34.7,34.43) -34.2,34.43 -33.053,33.283 -28.893,33.283 -25.876,30.267 -25.876,27.305 v2(-25.676,27.305) ; v2(-23.622,31.369) -23.622,28.04 J5.CD@-23.571,27.989 -23.571,27.555 -23.821,27.305 v2(-25.676,27.305) ; v2(-21.209,14.986) -25.676,19.453 v2(-25.676,27.305)
B0: J6.12 P15.11 U1.35 | length 40.6
  Top Layer w0.2: U1.35@4.402,-12.523 4.402,-12.529 10.668,-18.795 10.668,-20.694 16.009,-26.035 20.886,-26.035 21.898,-27.047 21.898,-27.606 22.686,-28.394 26.985,-28.394 27.248,-28.131 27.251,-28.131 27.442,-27.94 30.988,-27.94 31.877,-27.051 31.877,-26.043 33.65,-24.27 v1(34.7,-24.27)
B1: J6.9 P15.10 U1.36 | length 32.8
  Top Layer w0.2: U1.36@4.755,-12.17 11.448,-18.862 11.448,-20.338 16.691,-25.581 21.227,-25.581 22.352,-26.706 22.352,-27.418 22.874,-27.94 26.797,-27.94 27.536,-27.201 27.859,-27.201 28.25,-26.81 v1(29.3,-26.81)
B2: J6.14 P1.4 P15.13 U1.37 | length 38.1
  Top Layer w0.2: U1.37@5.109,-11.816 11.902,-18.609 11.902,-18.676 16.559,-23.333 21.099,-23.333 23.026,-25.26 23.101,-25.26 23.348,-25.507 P1.4@23.348,-27.032 ; P1.4@24.7,-27 25.75,-27 26.992,-25.758 30.362,-25.758 33.25,-22.871 33.25,-22.13 33.65,-21.73 v1(34.7,-21.73)
B3: J3.9 P2.10 U1.89 | length 41.3
  Top Layer w0.2: v1(-34.7,19.19) -33.65,19.19 -32.367,17.907 -28.006,17.907 -24.657,14.558 -24.657,7.646 -22.167,5.156 -11.863,5.156 U1.89@-5.816,-0.891
B4: J3.8 P2.7 U1.90 | length 34.1
  Top Layer w0.2: v1(-29.3,16.65) -28.9,16.25 -27.807,16.25 -25.111,13.554 -25.111,7.458 -22.355,4.702 -12.116,4.702 U1.90@-6.17,-1.245
B5: J3.7 P2.8 P14.1 U1.91 | length 76
  Top Layer w0.2: P14.1@-19.857,26.596 -19.857,23.45 -21.59,21.717 -23.554,21.717 -27.793,25.956 -30.997,25.956 -32.705,27.664 -36.598,27.664 -38.1,26.162 -38.1,20.039 -36.15,18.089 -36.15,17.05 -35.75,16.65 v1(-34.7,16.65) -33.65,16.65 -32.24,15.24 -27.686,15.24 -25.565,13.119 -25.565,7.15 -22.663,4.248 -12.369,4.248 U1.91@-6.523,-1.598
B6: J3.6 P2.5 P14.2 U1.92 | length 77.1
  Top Layer w0.2: P14.2@-18.857,26.596 -18.923,26.662 -18.923,27.559 -19.089,27.725 -20.408,27.725 -23.368,24.765 -25.908,24.765 -27.305,26.162 -27.305,27.432 -27.991,28.118 -37.287,28.118 -38.735,26.67 -38.735,18.034 -36.068,15.367 -33.406,15.367 -32.549,14.51 -29.7,14.51 v1(-29.3,14.11) -28.25,14.11 -26.035,11.895 -26.035,10.242 -26.034,10.241 -26.034,7.819 -26.035,7.818 -26.035,5.969 -23.86,3.794 -12.622,3.794 U1.92@-6.877,-1.952
B7: J3.5 P2.6 U1.93 | length 38.1
  Top Layer w0.2: v1(-34.7,14.11) -33.65,14.11 -32.367,12.827 -27.813,12.827 -26.489,11.503 -26.489,10.054 ; U1.93@-7.23,-2.305 -12.876,3.34 -24.93,3.34 -26.489,4.899 -26.489,8.006 -26.488,8.007 -26.488,10.053 ; -26.489,10.054 -26.488,10.053
B8: J3.4 P2.3 P10.2 U1.95 | length 50.5
  Top Layer w0.2: v1(-29.3,11.57) -28.9,11.17 -27.807,11.17 -26.943,10.306 -26.943,9.866 -26.942,9.865 -26.942,8.195 -26.943,8.194 -26.943,4.337 -25.492,2.886 -14.479,2.886 -10.05,-1.543 -9.407,-1.543 U1.95@-7.937,-3.012
  Bottom Layer w0.2: v1(-29.3,11.57) -29,11.57 -24.723,7.293 -20.894,7.293 -18.669,9.518 v1(-18.669,15.801)
B9: J3.3 P2.4 P10.1 U1.96 | length 60.9
  Top Layer w0.2: v1(-34.7,11.57) -33.65,11.57 -32.367,10.287 -27.813,10.287 -27.397,9.871 -27.397,9.678 -27.396,9.677 -27.396,8.383 -27.397,8.382 -27.397,3.902 -25.927,2.432 -14.667,2.432 -10.238,-1.997 -9.666,-1.997 -8.733,-2.93 -8.727,-2.93 U1.96@-8.291,-3.366
  Bottom Layer w0.2: v1(-34.7,11.57) -34.2,11.57 -33.07,12.7 -28.575,12.7 -23.622,7.747 -21.082,7.747 -19.669,9.16 v1(-19.669,15.801)
B10: J6.24 P11.2 P15.23 U1.47 | length 31.5